# EAGLE board led-cpu (EAGLE 6.2)
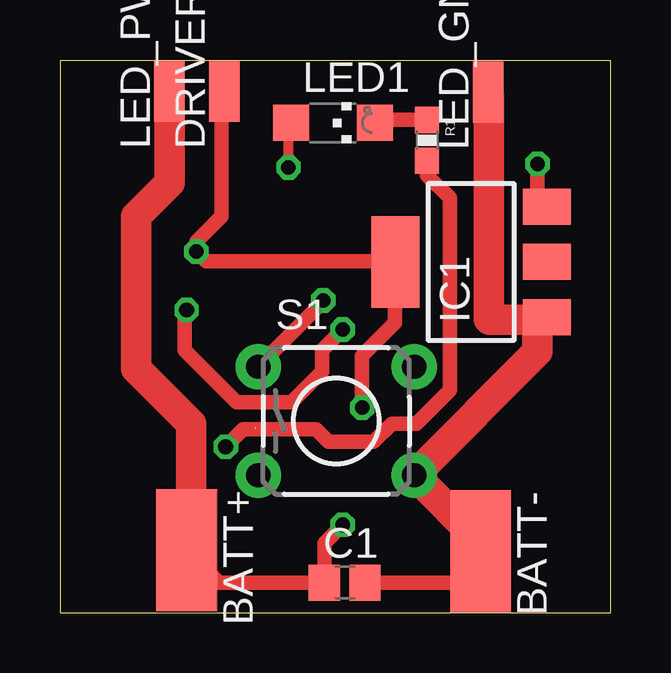
[diagram p0: board, top side]
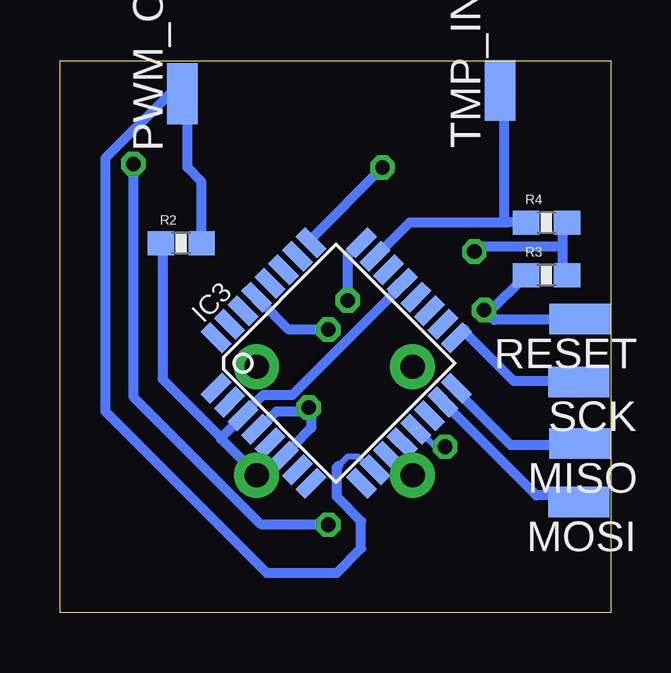
[diagram p1: board, bottom side, seen from below]

Size 22.97 x 23 mm. Coordinates in mm from the lower left corner, seen from the top.
Outline: 0,0 22.97,0 22.97,23 0,23 0,0
Copper layers (1*16): Top 0.035mm / dielectric 1.5mm / Bottom 0.035mm
Design rules: minimum track width 10mil, minimum drill 24mil, track to track 8mil, track to pad 8mil, pad to pad 8mil, via to via 8mil, smd to smd 8mil, copper to edge 40mil, drill to drill 8mil, minimum pad ring 10mil, minimum via ring 8mil, stop-mask expansion 4mil, vias tented up to drill 0mil, thermal gap 10mil
tKeepout: area 0,0 to 3.8,3.8; area 19.2,0 to 23,3.8; area 20,19 to 23,23; area 0,19 to 3,23
bKeepout: area 0,0 to 4,4; area 18.9,0 to 22.9,4; area 18.9,18.9 to 22.9,22.9; area 0,19 to 4,23

## Footprints (pad centres in the part's own frame; a part is rotated, then mirrored left to right if it is on the bottom)
SMD2,54-5,08 = smd 2.54 x 5.08: 1 0,0
C0805 = smd 1.3 x 1.5: 1 -0.85,0; 2 0.85,0
SMD1,27-2,54 = smd 1.27 x 2.54: 1 0,0
SOT223 = smd 1.5 x 2: 1 -2.3,-3.15; 2 0,-3.15; 3 2.3,-3.15 | smd 3.8 x 2: 4 0,3.15
TQFP32-08 = smd 1.27 x 0.559: 1 -4.293,2.8; 2 -4.293,2; 3 -4.293,1.2; 4 -4.293,0.4; 5 -4.293,-0.4; 6 -4.293,-1.2; 7 -4.293,-2; 8 -4.293,-2.8; 17 4.293,-2.8; 18 4.293,-2; 19 4.293,-1.2; 20 4.293,-0.4; 21 4.293,0.4; 22 4.293,1.2; 23 4.293,2; 24 4.293,2.8 | smd 0.559 x 1.27: 9 -2.8,-4.293; 10 -2,-4.293; 11 -1.2,-4.293; 12 -0.4,-4.293; 13 0.4,-4.293; 14 1.2,-4.293; 15 2,-4.293; 16 2.8,-4.293; 25 2.8,4.293; 26 2,4.293; 27 1.2,4.293; 28 0.4,4.293; 29 -0.4,4.293; 30 -1.2,4.293; 31 -2,4.293; 32 -2.8,4.293
CHIPLED_1206 = smd 1.5 x 1.5: A 0,-1.75; C 0,1.75
0603-RES = smd 1.1 x 1: 1 -0.85,0; 2 0.85,0
TACTILE-PTH = drill 1.016 pad 1.88: 1 -3.251,2.261; 2 3.251,2.261; 3 -3.251,-2.261; 4 3.251,-2.261

## Placement (x,y rotation side)
BATT+  [SMD2,54-5,08]  5.29,2.6 180 top
BATT-  [SMD2,54-5,08]  17.54,2.56 180 top
C1  0.1uF  [C0805]  11.87,1.25 0 top
DRIVER_PWR  [SMD1,27-2,54]  6.86,21.72 0 top
IC1  LD117AS50TR  [SOT223]  17.14,14.61 90 top
IC3  MEGA8-AI  [TQFP32-08]  11.45,10.39 45 bottom
LED1  D1  [CHIPLED_1206]  11.38,20.4 270 top
LED_GND  [SMD1,27-2,54]  17.85,21.67 0 top
LED_PWR  [SMD1,27-2,54]  4.57,21.72 0 top
MISO  MISO  [SMD1,27-2,54]  1.29,7.04 90 bottom
MOSI  MOSI  [SMD1,27-2,54]  1.33,4.61 90 bottom
PWM_OUT  [SMD1,27-2,54]  17.87,21.62 0 bottom
R1  33  [0603-RES]  15.31,19.67 270 top
R2  10k  [0603-RES]  17.92,15.39 0 bottom
R3  10k  [0603-RES]  2.68,14.05 0 bottom
R4  2k7  [0603-RES]  2.68,16.25 0 bottom
RESET  [SMD1,27-2,54]  1.3,12.23 90 bottom
S1  [TACTILE-PTH]  11.52,7.98 0 top
SCK  SCK  [SMD1,27-2,54]  1.33,9.61 90 bottom
TMP_IN  [SMD1,27-2,54]  4.63,21.75 0 bottom

## Library data of the parts
BATT+ BATT- DRIVER_PWR LED_GND LED_PWR MISO MOSI PWM_OUT RESET SCK TMP_IN = wirepad
C1 = resistor
IC1 = v-reg
IC3 = atmel; MPN: ATMEGA8-16AU; OC_FARNELL: 9171371; OC_NEWARK: 73M8863
LED1 = led
R1-R4 S1 = SparkFun

## Nets
AVCC: IC3.18
IND_LED_A: IC3.25 LED1.A
IND_LED_B: IC3.13 R1.2
LED_GND: BATT-.1 C1.2 IC1.1 IC3.3 IC3.5 IC3.21 LED_GND.1 R2.1 S1.4
MISO: IC3.16 MISO.1
MOSI: IC3.15 MOSI.1
N$1: LED1.C R1.1
N$5: BATT+.1 C1.1 IC1.3 LED_PWR.1
PWM_OUT: IC3.10 PWM_OUT.1 R2.2
PWR_SW: IC3.24 S1.1
RESET: IC3.29 R3.1 RESET.1
SCK: IC3.17 SCK.1
TMP_IN: IC3.23 R4.1 TMP_IN.1
VCC: DRIVER_PWR.1 IC1.4 IC3.4 IC3.6 R3.2 R4.2

## Tracks (layer width: path | path; a pad name or v marks a point on that pad's centre or on a via)
IND_LED_A  (via drill 0.6)
  Top 0.406: v9.53,18.54 9.53,20.29 LED1.A
  Bottom 0.406: IC3.25 12.51,15.56 v9.53,18.54
IND_LED_B  (via drill 0.61)  (1 unrouted)
  Top 0.61: R1.2 15.31,18.22 16.26,17.27 16.26,9.27 14.86,7.87 13.84,7.87 13.08,7.11 11.2,7.11 10.68,7.64 7.64,7.64 v6.91,6.91
  Bottom 0.254: v6.91,6.91 7.32,6.91 8.13,7.72
LED_GND
  Top 0.254: 15.04,5.69 S1.4 | 19.91,12.19 IC1.1 | 15.04,6.1 S1.4 | 17.48,2.85 BATT-.1 | 14.63,5.69 S1.4
  Top 0.61: C1.2 17.25,1.25 17.53,1.52 17.53,2.54 BATT-.1
  Top 1.27: LED_GND.1 17.88,21.54 17.88,12.22 17.91,12.19 19.91,12.19 | 17.48,2.85 17.48,3.02 S1.4 19.91,10.86 19.91,12.19 | 19.91,12.19 20.18,12.19 IC1.1 | 19.91,12.24 19.91,12.19
  Bottom 0.254: 18.69,15.04 R2.1 | IC3.5 14.22,6.91 15.04,6.1 S1.4 | 15.44,8.13 IC3.3 15.04,8.53 | 8.94,13.41 IC3.21
  Bottom 0.406: 8.94,13.41 13.28,9.07 14.5,9.07 15.04,8.53 | 15.04,6.1 15.11,6.1 16.26,7.24 16.26,7.29 | 16.26,7.29 IC3.3 | 18.69,15.04 18.69,9.73 16.26,7.29
MISO
  Bottom 0.254: 6.1,8.94 IC3.16 | 1.63,7.32 MISO.1
  Bottom 0.406: 6.1,8.94 6.1,8.89 4.19,6.99 1.35,6.99 MISO.1
MOSI
  Bottom 0.254: 6.91,8.53 IC3.15 | 1.63,4.88 MOSI.1
  Bottom 0.406: 1.63,4.88 3.11,4.88 IC3.15
N$1
  Top 0.254: 12.6,19.91 13.01,20.32 LED1.C
  Top 0.61: R1.1 13.25,20.52 LED1.C
N$5  (via drill 0.61)
  Top 0.254: 6.1,2.03 5.69,2.44 BATT+.1 5.28,2.85 | 19.91,17.07 IC1.3
  Top 0.61: v19.91,18.69 19.91,17.07 | BATT+.1 6.64,1.25 C1.1 11.02,2.89 v11.79,3.66
  Top 1.27: 5.28,2.85 5.46,2.85 5.46,7.87 3.17,10.16 3.17,16.51 4.57,17.91 LED_PWR.1
  Bottom 0.406: v19.91,18.69 19.91,8.99 14.61,3.68 11.81,3.68 v11.79,3.66
PWM_OUT
  Bottom 0.254: 17.07,15.44 R2.2 | 17.48,21.54 PWM_OUT.1 17.88,21.54 18.29,21.54 | 11.38,6.1 10.97,6.5 10.57,6.5 10.16,6.1 IC3.10
  Bottom 0.406: 18.29,21.54 18.47,21.54 21.08,18.92 21.08,8.38 14.35,1.65 11.43,1.65 10.41,2.67 10.41,3.81 11.43,4.83 11.43,6.04 11.38,6.1 | 17.07,15.44 17.07,17.96 17.65,18.54 17.65,21.59 PWM_OUT.1
PWR_SW  (via drill 0.61)
  Top 0.254: 8.53,10.57 S1.1
  Top 0.61: v10.97,13.01 10.97,12.95 S1.1
  Bottom 0.254: 10.57,15.29 IC3.24
  Bottom 0.406: 10.57,15.29 10.97,14.88 v10.97,13.01
RESET  (via drill 0.61)
  Top 0.61: v11.79,11.79 10.92,10.92 10.92,10.03 9.65,8.76 7.37,8.76 5.21,10.92 5.21,12.52 v5.28,12.6
  Bottom 0.254: 3.25,13.82 R3.1 3.66,14.22 | 1.63,12.19 RESET.1 | 14.63,13.01 IC3.29
  Bottom 0.406: 1.63,12.19 4.88,12.19 5.21,12.52 | 5.21,12.52 v5.28,12.6 | 5.21,12.52 5.07,12.52 R3.1 | 14.63,13.01 14.63,12.98 13.46,11.81 11.81,11.81 v11.79,11.79
SCK
  Bottom 0.254: 6.1,11.79 IC3.17 | 1.63,9.75 SCK.1
  Bottom 0.406: 6.1,11.79 6.1,11.68 4.06,9.65 1.37,9.65 SCK.1
TMP_IN
  Bottom 0.254: 9.75,15.04 IC3.23 | 3.66,16.26 R4.1
  Bottom 0.406: 9.75,15.04 9.6,15.04 8.38,16.26 4.32,16.26 | R4.1 3.54,16.26 4.32,16.26 | 4.32,16.26 4.45,16.38 4.45,21.7 TMP_IN.1
VCC  (via drill 0.61)
  Top 0.254: 13.82,14.22 IC1.4 13.82,14.63 | 6.91,21.54 7.18,21.27
  Top 0.61: 6.91,21.54 DRIVER_PWR.1 | v12.6,8.53 12.6,10.69 13.97,12.06 13.97,14.58 IC1.4 | 13.82,14.63 6.1,14.63 v5.69,15.04 5.69,15.47 6.73,16.51 6.73,20.83 7.18,21.27
  Bottom 0.254: 12.57,8.38 12.57,8.51 12.52,8.61 v12.6,8.53 | 14.61,7.75 14.63,7.72 IC3.4 | 13.28,6.91 IC3.6 | 2.03,14.22 R3.2 | 2.03,15.85 R4.2
  Bottom 0.406: 13.28,6.91 12.5,7.7 12.52,8.61 | 12.57,8.38 13.95,8.38 14.61,7.75 | 2.03,15.24 2.03,14.25 R3.2 | 2.03,15.85 2.03,15.24 | 2.03,15.24 5.49,15.24 v5.69,15.04